# Altium PCB ArduinoMega.PcbDoc
Units mm, origin at the board's own origin, x right, y up, seen from the top; angles counter-clockwise.
Board outline 100 x 200 mm, 2 copper layers (Top Layer, Bottom Layer); 8 components, 51 nets, 160 pads, 6 vias.
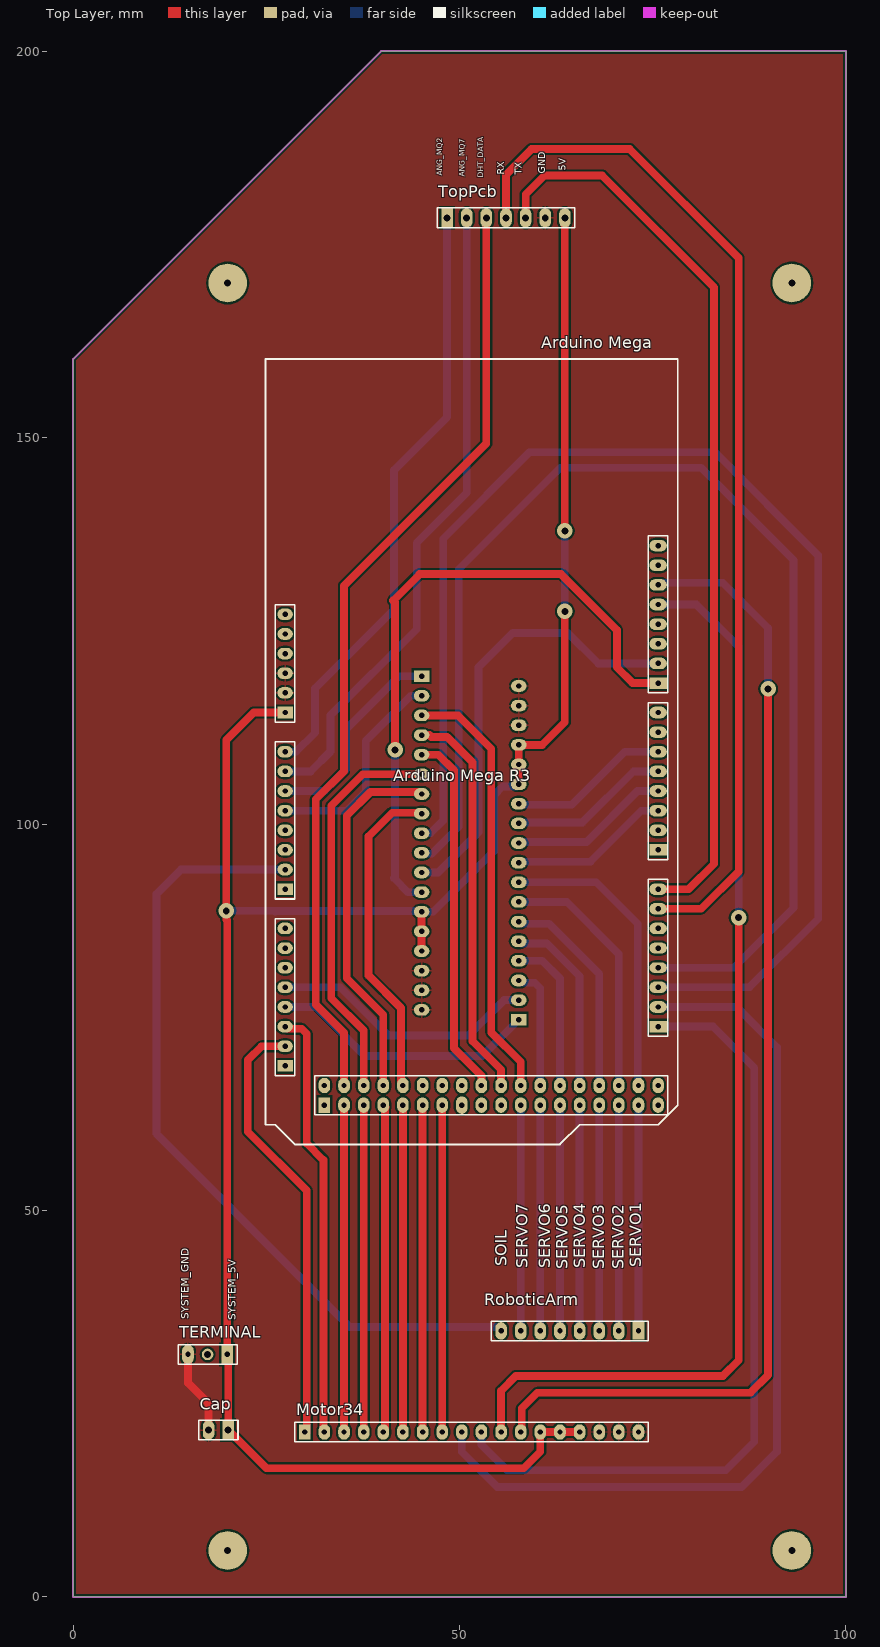
[diagram p0: Top Layer view]
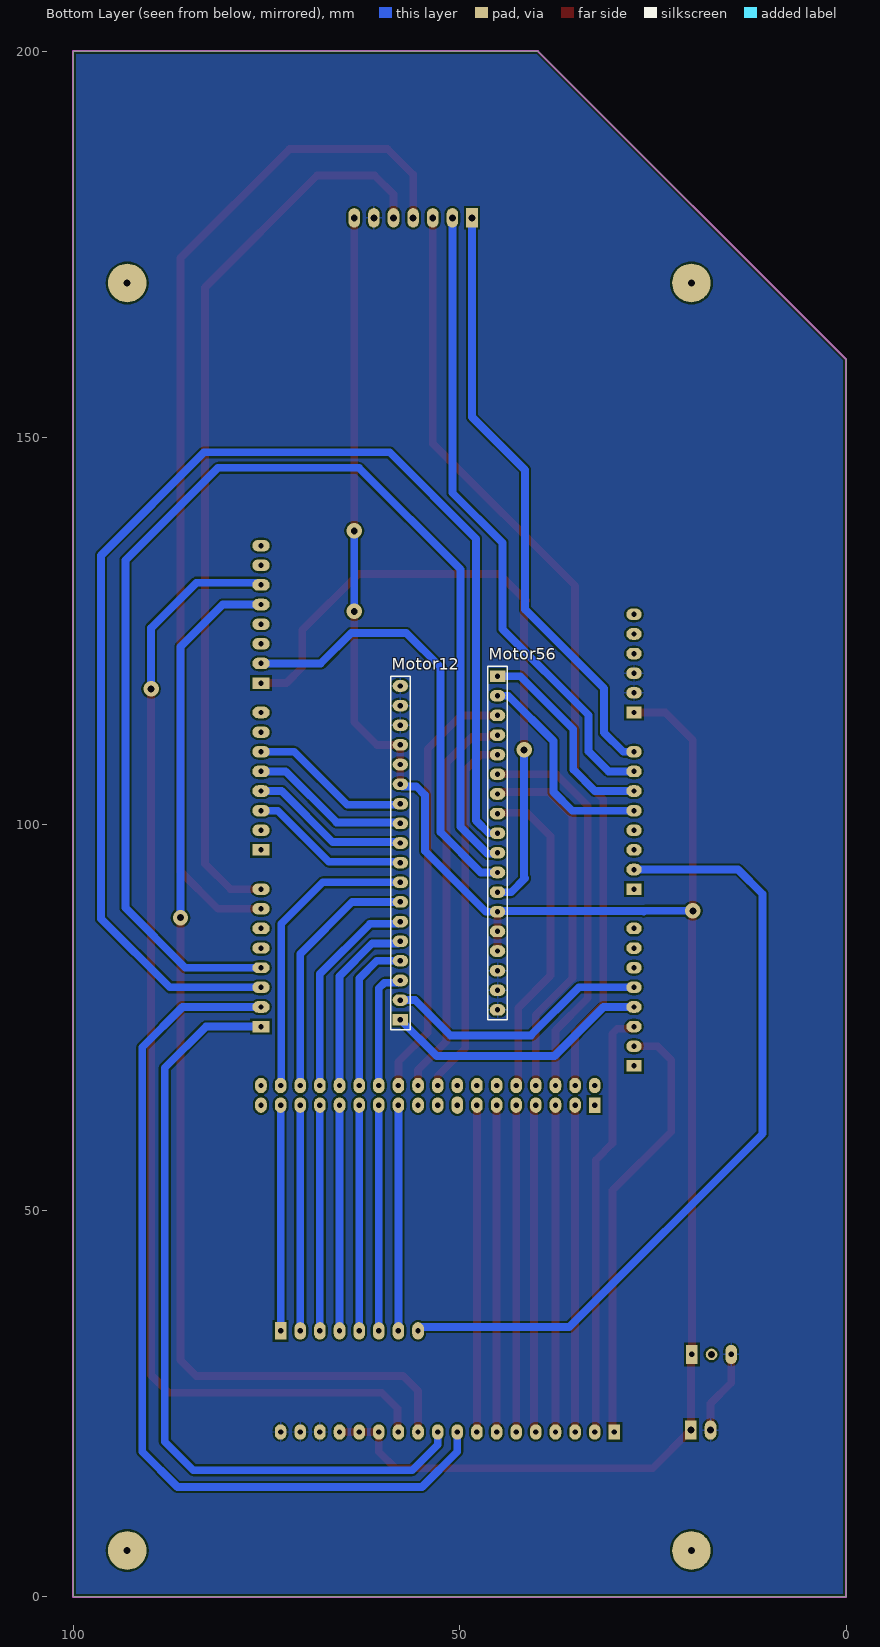
[diagram p1: Bottom Layer view, seen from below]

## Layer stack, top to bottom
Top Solder: solder mask 0.0102, Solder Resist, Dk 3.5
Top Layer: signal copper 0.0356
Dielectric 1: dielectric 0.32, FR-4, Dk 4.8
Bottom Layer: signal copper 0.0356
Bottom Solder: solder mask 0.0102, Solder Resist, Dk 3.5

## Board outline
0,0 0,160.147 39.853,200 100,200 100,0

## Design rules (kind name [scope] priority, off if disabled: settings)
Clearance [All] p1: gap=0.254 ignorepadtopadclearanceinfootprint=FALSE except(0: Arc-Hole Track-Hole SMDPad-Hole THPad-Hole Via-Hole Fill-Hole Poly-Hole Region-Hole Text-Hole; 1: Arc-Arc Arc-Track Arc-SMDPad Arc-THPad Arc-Via Track-Track Track-SMDPad Track-THPad Track-Via SMDPad-SMDPad SMDPad-THPad SMDPad-Via THPad-THPad THPad-Via Via-Via)
ComponentClearance [All] p1: gap=0.254 collisioncheckmode=3 verticalgap=0 showdistances=FALSE
PolygonConnect [All] p1: connectstyle=Relief reliefconductorwidth=0.254 reliefentries=4 polygonreliefangle="90 Angle" airgapwidth=0.254
RoutingVias [All] p1: holewidth=0.711 width=1.27 viastyle="Through Hole" minholewidth=0.711 minwidth=1.27 maxholewidth=0.711 maxwidth=1.27
SolderMaskExpansion [All] p1: expansion=0.102
Width [All] p1: maxlimit=1 minlimit=0.8 preferedwidth=1 minimp=50.000000 maximp=50.000000 favimp=50.000000
29 further rules are at their usual default settings.

## Components (designator, comment, footprint, x,y, rotation, side; value= is the part's Value field where it differs from the comment)
"Arduino Mega" "ARDUINO MEGA" "ARDUINO MEGA" 52.832,106.807 r270 top
Cap "Cap" HDR1X2 20.066,21.59 r180 top
Motor12 "Header 18" HDR1X18 57.658,74.676 r90 bottom
Motor34 "Header 18" HDR1X18 29.972,21.336 r0 top
Motor56 "Header 18" HDR1X18 45.085,119.126 r270 bottom
RoboticArm "Header 8" HDR1X8 73.152,34.417 r180 top
TERMINAL "Header 3" HDR1X3 19.939,31.369 r180 top
TopPcb "Header 7" HDR1X7 48.387,178.435 r0 top

## Footprints (in the part's own frame and the unit in brackets; to place one, negate y for a bottom-side part, rotate by r counter-clockwise, add the part's x,y. Pads: shape width x height; smd on the part's side, far side on the other; paste and mask are expansions set on the pad)
"ARDUINO MEGA" [mm] "Arduino Mega 2560"
  rect 1.5x2.25 hole 0.7: 0(10.16,22.86) 8(-11.43,22.86) 21(33.02,22.86)
  oval 1.5x2.25 hole 0.7: 1(7.62,22.86) 2(5.08,22.86) 3(2.54,22.86) 4(0,22.86) 5(-2.54,22.86) 6(-5.08,22.86) 7(-7.62,22.86) 9(-13.97,22.86) 10(-16.51,22.86) 11(-19.05,22.86) 12(-21.59,22.86) 13(-24.13,22.86) 14(15.24,22.86) 15(17.78,22.86) 16(20.32,22.86) 19(27.94,22.86) 20(30.48,22.86) 76(-26.67,22.86) 77(-29.21,22.86)
  oval 1.4x2.25 hole 0.7: 17(22.86,22.86) 18(25.4,22.86)
  oval 2x1.5 hole 0.7: 22(40.64,20.32) 23(43.18,20.32) 24(40.64,17.78) 25(43.18,17.78) 26(40.64,15.24) 27(43.18,15.24) 28(40.64,12.7) 29(43.18,12.7) 30(40.64,10.16) 31(43.18,10.16) 32(40.64,7.62) 33(43.18,7.62) 34(40.64,5.08) 35(43.18,5.08) 36(40.64,2.54) 37(43.18,2.54) 38(40.64,0) 39(43.18,0) 40(40.64,-2.54) 42(40.64,-5.08) 43(43.18,-5.08) 44(40.64,-7.62) 45(43.18,-7.62) 46(40.64,-10.16) 47(43.18,-10.16) 48(40.64,-12.7) 49(43.18,-12.7) 50(40.64,-15.24) 51(43.18,-15.24) 52(40.64,-17.78) 53(43.18,-17.78) 78(40.64,-20.32) 80(43.18,22.86) 81(40.64,22.86)
  oval 2.25x1.5 hole 0.7: 41(43.18,-2.54)
  oval 1.5x2 hole 0.7: 54(-20.32,-25.4) 55(-17.78,-25.4) 56(-15.24,-25.4) 57(-12.7,-25.4) 58(-10.16,-25.4) 60(-2.54,-25.4) 61(0,-25.4) 62(2.54,-25.4) 63(5.08,-25.4) 64(7.62,-25.4) 65(10.16,-25.4) 66(12.7,-25.4) 68(20.32,-25.4) 69(22.86,-25.4) 70(25.4,-25.4) 71(27.94,-25.4) 72(30.48,-25.4) 73(33.02,-25.4) 74(35.56,-25.4)
  rect 1.5x2 hole 0.7: 59(-7.62,-25.4) 67(15.24,-25.4) 75(38.1,-25.4)
  rect 2x1.5 hole 0.7: 79(43.18,-20.32)
  silkscreen extent -53.34,-27.94 48.26,25.4
HDR1X2 [mm] "Connector; Header; 2 Position"
  rect 1.5x2.5 hole 0.9: 1(0,0)
  oval 1.5x2.5 hole 0.9: 2(2.54,0)
  silkscreen extent -1.27,-1.27 3.81,1.27
HDR1X3 [mm] "Connector; Header; 3 Position"
  rect 1.5x2.5 hole 0.7: 1(0,0)
  round 1.5 hole 0.9: 2(2.54,0)
  oval 1.5x2.5 hole 0.7: 3(5.08,0)
  silkscreen extent -1.27,-1.27 6.35,1.27
HDR1X7 [mm] "Connector; Header; 7 Position"
  rect 1.5x2.5 hole 0.9: 1(0,0)
  oval 1.5x2.5 hole 0.9: 2(2.54,0) 3(5.08,0) 4(7.62,0) 5(10.16,0) 6(12.7,0) 7(15.24,0)
  silkscreen extent -1.27,-1.27 16.51,1.27
HDR1X8 [mm] "Connector; Header; 8 Position"
  rect 1.5x2.25 hole 0.7: 1(0,0)
  oval 1.5x2.25 hole 0.7: 2(2.54,0) 3(5.08,0) 4(7.62,0) 5(10.16,0) 6(12.7,0) 7(15.24,0) 8(17.78,0)
  silkscreen extent -1.27,-1.27 19.05,1.27
HDR1X18 [mm] "Connector; Header; 18 Position"
  rect 1.5x2 hole 0.7: 1(0,0)
  oval 1.5x2 hole 0.7: 2(2.54,0) 3(5.08,0) 4(7.62,0) 5(10.16,0) 6(12.7,0) 7(15.24,0) 8(17.78,0) 9(20.32,0) 10(22.86,0) 11(25.4,0) 12(27.94,0) 13(30.48,0) 14(33.02,0) 15(35.56,0) 16(38.1,0) 17(40.64,0) 18(43.18,0)
  silkscreen extent -1.27,-1.27 44.45,1.27

## Part data
Cap: library part "Header 2", "Header, 2-Pin", LatestRevisionDate=17-Jul-2002, LatestRevisionNote="Re-released for DXP Platform.", Publisher="Altium Limited"
Motor12 Motor34 Motor56: "Header, 18-Pin", LatestRevisionDate=17-Jul-2002, LatestRevisionNote="Re-released for DXP Platform.", Publisher="Altium Limited"
RoboticArm: "Header, 8-Pin", LatestRevisionDate=17-Jul-2002, LatestRevisionNote="Re-released for DXP Platform.", Publisher="Altium Limited"
TERMINAL: "Header, 3-Pin", LatestRevisionDate=17-Jul-2002, LatestRevisionNote="Re-released for DXP Platform.", Publisher="Altium Limited"
TopPcb: "Header, 7-Pin", LatestRevisionDate=17-Jul-2002, LatestRevisionNote="Re-released for DXP Platform.", Publisher="Altium Limited"

## Free pads (board coordinates)
  round 5 hole 0.9: 2(20,6) 3(93,6) 4(93,170) 5(20,170)

## Via types
v1: diameter 2, hole 0.9, Top Layer to Bottom Layer, 6 vias

## Nets (pads, with @x,y where several pads share a name; then routed paths per layer and width w, separated by ;. In a path a pad name is that pad's centre, name@x,y a point inside that pad or via, vN(x,y) a via of type N, cw(c..) or ccw(c..) an arc to the next point about the centre after c; other vN are vias at no path point)
5: "Arduino Mega.59" Cap.1 Motor12.13 Motor12.14 Motor12.15 Motor34.13 Motor34.14 Motor34.15 Motor56.13 Motor56.14 Motor56.15 TERMINAL.1 TopPcb.7 | length 280.5
  Top Layer w1: TERMINAL.1@19.685,30.861 20.066,30.48 Cap.1@20.066,22.623 ; TERMINAL.1@19.939,30.734 TERMINAL.1 19.939,43.434 19.939,87.503 19.812,87.63 v1(19.812,88.773) 19.812,110.871 23.368,114.427 27.432,114.427 ; Cap.1 25.019,16.637 58.293,16.637 60.452,18.796 Motor34.13 Motor34.14 Motor34.15 ; Motor56.15 Motor56.14 Motor56.13 ; Motor12.13 Motor12.14 Motor12.15 60.706,110.236 63.627,113.157 v1(63.627,127.508) ; v1(63.627,137.922) TopPcb.7 TopPcb.7@63.754,178.562
  Bottom Layer w1: v1(19.812,88.773) 26.032,88.773 26.159,88.646 26.25,88.737 45.085,88.737 Motor56.13 46.609,88.646 54.483,96.52 54.483,103.749 55.6,104.866 57.368,104.866 Motor12.13 ; v1(63.627,127.508) v1(63.627,137.922)
ANG_MQ2: "Arduino Mega.60" TopPcb.1 | length 78.6
  Bottom Layer w1: 27.432,109.347 28.829,109.347 31.306,111.824 31.306,117.539 41.529,127.762 41.529,145.796 48.387,152.654 TopPcb.1
ANG_MQ7: "Arduino Mega.61" TopPcb.2 | length 83.3
  Bottom Layer w1: 27.432,106.807 30.734,106.807 33.306,109.379 33.306,114.078 44.45,125.222 44.45,136.398 50.927,142.875 TopPcb.2
Current_sensor_1_1: "Arduino Mega.72" Motor12.1 | length 34.8
  Bottom Layer w1: 27.432,76.327 31.369,76.327 37.719,69.977 52.959,69.977 Motor12.1
Current_sensor_1_2: "Arduino Mega.71" Motor12.2 | length 34.7
  Bottom Layer w1: 27.432,78.867 34.544,78.867 40.767,72.644 51.181,72.644 55.753,77.216 Motor12.2
Current_sensor_2_1: "Arduino Mega.74" Motor34.1 | length 56.9
  Top Layer w1: 27.432,71.247 24.384,71.247 22.606,69.469 22.606,60.198 30.226,52.578 Motor34.1@30.226,21.336
Current_sensor_2_2: "Arduino Mega.73" Motor34.2 | length 55.6
  Top Layer w1: 27.432,73.787 27.722,73.497 29.591,73.497 30.226,72.862 30.226,58.674 32.385,56.515 Motor34.2@32.385,21.336
Current_sensor_3_1: "Arduino Mega.62" Motor56.1 | length 26.9
  Bottom Layer w1: 27.432,104.267 32.512,104.267 35.306,107.061 35.306,112.268 42.164,119.126 Motor56.1
Current_sensor_3_2: "Arduino Mega.63" Motor56.2 | length 27.7
  Bottom Layer w1: 27.432,101.727 35.433,101.727 37.846,104.14 37.846,110.744 43.688,116.586 Motor56.2
DHT_DATA: "Arduino Mega.52" TopPcb.3 | length 122.8
  Top Layer w1: 35.052,66.252 35.052,72.991 31.401,76.642 31.401,103.19 35.052,106.841 35.052,130.81 53.467,149.225 TopPcb.3
DRIVE_1_4: "Arduino Mega.32" Motor12.3 | length 15.8
  Bottom Layer w1: Motor12.3 57.948,79.466 59.716,79.466 60.452,78.73 60.452,66.167
DRIVE_1_5: "Arduino Mega.5" Motor12.12 | length 20.9
  Bottom Layer w1: Motor12.12@57.658,102.489 64.516,102.489 71.374,109.347 75.692,109.347
DRIVE_1_6: "Arduino Mega.4" Motor12.11 | length 20.8
  Bottom Layer w1: Motor12.11@57.658,100.203 65.913,100.203 72.517,106.807 75.692,106.807
DRIVE_1_7: "Arduino Mega.30" Motor12.4 | length 20.1
  Bottom Layer w1: Motor12.4 60.706,82.296 62.992,80.01 62.992,66.167
DRIVE_1_8: "Arduino Mega.28" Motor12.5 | length 23.9
  Bottom Layer w1: Motor12.5 57.948,84.546 61.284,84.546 65.532,80.298 65.532,66.167
DRIVE_1_9: "Arduino Mega.26" Motor12.6 | length 27.6
  Bottom Layer w1: Motor12.6 57.948,87.086 61.573,87.086 68.072,80.587 68.072,66.167
DRIVE_2_4: "Arduino Mega.53" Motor34.3 | length 42.3
  Top Layer w1: Motor34.3 35.052,63.627
DRIVE_2_5: "Arduino Mega.13" Motor34.12 | length 150.1
  Top Layer w1: Motor34.12@58.039,21.336 58.039,24.384 60.071,26.416 87.63,26.416 89.916,28.702 v1(89.916,117.475)
  Bottom Layer w1: 75.692,130.937 75.982,131.227 84.038,131.227 89.916,125.349 v1(89.916,117.475)
DRIVE_2_6: "Arduino Mega.12" Motor34.11 | length 142.7
  Top Layer w1: Motor34.11 55.372,26.67 57.277,28.575 84.074,28.575 86.106,30.607 v1(86.106,87.884)
  Bottom Layer w1: 75.692,128.397 80.645,128.397 86.106,122.936 v1(86.106,87.884)
DRIVE_2_7: "Arduino Mega.51" Motor34.4 | length 42.3
  Top Layer w1: Motor34.4 37.592,63.627
DRIVE_2_8: "Arduino Mega.49" Motor34.5 | length 42.5
  Top Layer w1: 40.132,63.627 40.422,63.337 40.362,63.337 Motor34.5@40.362,21.336
DRIVE_2_9: "Arduino Mega.47" Motor34.6 | length 42.3
  Top Layer w1: Motor34.6 42.672,63.627
DRIVE_3_4: "Arduino Mega.34" Motor56.3 | length 54.9
  Top Layer w1: 46.101,114.046 49.784,114.046 54.102,109.728 54.102,73.025 57.912,69.215 57.912,66.167
DRIVE_3_5: "Arduino Mega.8" Motor56.12 | length 84.8
  Top Layer w1: v1(41.656,109.601) 41.656,128.651 41.402,128.905 44.831,132.334 63.119,132.334 70.358,125.095 70.358,120.269 72.39,118.237 75.692,118.237
  Bottom Layer w1: v1(41.656,109.601) 41.656,93.091 41.529,92.964 43.307,91.186 Motor56.12
DRIVE_3_6: "Arduino Mega.9" Motor56.11 | length 57.6
  Bottom Layer w1: Motor56.11 47.244,93.726 52.451,98.933 52.451,120.269 56.896,124.714 64.008,124.714 67.945,120.777 75.692,120.777
DRIVE_3_7: "Arduino Mega.36" Motor56.4 | length 50.3
  Top Layer w1: 46.101,111.506 46.355,111.252 48.387,111.252 51.689,107.95 51.689,71.882 55.372,68.199 55.372,66.252
DRIVE_3_8: "Arduino Mega.38" Motor56.5 | length 46.3
  Top Layer w1: 46.101,108.966 47.244,108.966 49.276,106.934 49.276,70.993 52.832,67.437 52.832,66.167
DRIVE_3_9: "Arduino Mega.50" Motor56.6 | length 51.2
  Top Layer w1: 37.592,66.294 37.592,73.279 33.401,77.47 33.401,102.362 37.465,106.426 Motor56.6
Encoder_1_DIG_1: "Arduino Mega.24" Motor12.7 | length 32.8
  Bottom Layer w1: Motor12.7 63.881,89.916 70.612,83.185 70.612,66.167
Encoder_1_DIG_2: "Arduino Mega.22" Motor12.8 | length 38.6
  Bottom Layer w1: Motor12.8 67.691,92.456 73.067,87.08 73.067,66.167 73.152,66.167
Encoder_1_INT_1: "Arduino Mega.3" Motor12.10 | length 20.8
  Bottom Layer w1: Motor12.10@57.658,97.663 66.421,97.663 73.025,104.267 75.692,104.267
Encoder_1_INT_2: "Arduino Mega.2" Motor12.9 | length 20.6
  Bottom Layer w1: Motor12.9@57.785,95.123 66.929,95.123 73.533,101.727 75.692,101.727
Encoder_2_DIG_1: "Arduino Mega.45" Motor34.7 | length 42.2
  Top Layer w1: Motor34.7@45.212,21.463 45.212,63.627
Encoder_2_DIG_2: "Arduino Mega.43" Motor34.8 | length 42.3
  Top Layer w1: Motor34.8 47.752,63.627
Encoder_2_INT_1: "Arduino Mega.21" Motor34.10 | length 102.9
  Bottom Layer w1: Motor34.10 52.832,19.685 56.134,16.383 84.455,16.383 88.138,20.066 88.138,68.453 82.804,73.787 75.692,73.787
Encoder_2_INT_2: "Arduino Mega.20" Motor34.9 | length 116.9
  Bottom Layer w1: Motor34.9 50.292,18.796 54.864,14.224 86.487,14.224 91.059,18.796 91.059,71.12 85.852,76.327 75.692,76.327
Encoder_3_DIG_1: "Arduino Mega.48" Motor56.7 | length 47.7
  Top Layer w1: 40.132,66.294 40.132,75.311 35.401,80.042 35.401,101.06 38.481,104.14 Motor56.7@45.085,104.14
Encoder_3_DIG_2: "Arduino Mega.46" Motor56.8 | length 41.9
  Top Layer w1: 42.418,66.421 42.418,76.2 38.227,80.391 38.227,98.425 41.275,101.473 Motor56.8@45.085,101.473
Encoder_3_INT_1: "Arduino Mega.18" Motor56.10 | length 159
  Bottom Layer w1: Motor56.10@45.085,96.139 46.389,96.139 49.879,99.629 49.879,132.937 63.024,146.082 81.248,146.082 93.218,134.112 93.218,89.154 85.471,81.407 75.692,81.407
Encoder_3_INT_2: "Arduino Mega.19" Motor56.9 | length 170
  Bottom Layer w1: Motor56.9 46.228,98.806 47.879,100.457 47.879,136.906 59.055,148.082 83.058,148.082 96.393,134.747 96.393,87.757 87.503,78.867 75.692,78.867
GND: "Arduino Mega.57" "Arduino Mega.58" Cap.2 Motor12.16 Motor12.17 Motor12.18 Motor34.16 Motor34.17 Motor34.18 Motor56.16 Motor56.17 Motor56.18 TERMINAL.3 TopPcb.6 | length 10.9
  Top Layer w1: TERMINAL.3 14.859,27.686 17.526,25.019 Cap.2
RX: "Arduino Mega.15" TopPcb.4 | length 134.7
  Top Layer w1: TopPcb.4 56.007,184.023 59.309,187.325 72.009,187.325 86.106,173.228 86.106,93.853 81.28,89.027 75.692,89.027
SERVO1: "Arduino Mega.23" RoboticArm.1 | length 29.2
  Bottom Layer w1: RoboticArm.1 73.152,63.627
SERVO2: "Arduino Mega.25" RoboticArm.2 | length 29.2
  Bottom Layer w1: RoboticArm.2 70.612,63.627
SERVO3: "Arduino Mega.27" RoboticArm.3 | length 29.2
  Bottom Layer w1: RoboticArm.3 68.072,63.627
SERVO4: "Arduino Mega.29" RoboticArm.4 | length 29.2
  Bottom Layer w1: RoboticArm.4 65.532,63.627
SERVO5: "Arduino Mega.31" RoboticArm.5 | length 29.2
  Bottom Layer w1: RoboticArm.5 62.992,63.627
SERVO6: "Arduino Mega.33" RoboticArm.6 | length 29.2
  Bottom Layer w1: RoboticArm.6 60.452,63.627
SERVO7: "Arduino Mega.35" RoboticArm.7 | length 29.2
  Bottom Layer w1: RoboticArm.7 57.912,63.627
SOIL: "Arduino Mega.66" RoboticArm.8 | length 104.2
  Bottom Layer w1: 27.432,94.107 13.97,94.107 10.795,90.932 10.795,59.944 35.814,34.925 54.991,34.925 55.372,34.544 RoboticArm.8
TX: "Arduino Mega.14" TopPcb.5 | length 117.6
  Top Layer w1: TopPcb.5 58.547,181.483 60.96,183.896 68.453,183.896 82.931,169.418 82.931,94.869 79.629,91.567 75.692,91.567
pads on no net: "Arduino Mega.0" "Arduino Mega.1" "Arduino Mega.6" "Arduino Mega.7" "Arduino Mega.10" "Arduino Mega.11" "Arduino Mega.16" "Arduino Mega.17" "Arduino Mega.37" "Arduino Mega.39" "Arduino Mega.40" "Arduino Mega.41" "Arduino Mega.42" "Arduino Mega.44" "Arduino Mega.54" "Arduino Mega.55" "Arduino Mega.56" "Arduino Mega.64" "Arduino Mega.65" "Arduino Mega.67" "Arduino Mega.68" "Arduino Mega.69" "Arduino Mega.70" "Arduino Mega.75" "Arduino Mega.76" "Arduino Mega.77" "Arduino Mega.78" "Arduino Mega.79" "Arduino Mega.80" "Arduino Mega.81" TERMINAL.2

## Polygon pours and split planes (outlines as drawn)
GND on Top Layer "Top" (solid, remove dead copper, pour order 13): 0,0 0,160.147 39.853,200 100,200 100,0
GND on Bottom Layer "Bottom" (solid, remove dead copper, pour order 14): 0,0 0,160.147 39.853,200 100,200 100,0

## Keep-outs
Keep-Out Layer:
  the board outline again, w0.254

## Silkscreen, mask and mechanical layers (free items; w line width, h text height)
Top Overlay:
  text "5V" at 63.754,184.531 h0.9 r90
  text "GND" at 61.087,184.15 h0.9 r90
  text "RX" at 55.753,184.023 h0.9 r90
  text "TX" at 58.039,184.023 h0.9 r90
  text "ANG_MQ2" at 47.762,183.896 h0.7 r90
  text "ANG_MQ7" at 50.683,183.769 h0.7 r90
  text "DHT_DATA" at 53.096,183.642 h0.7 r90
  text "SOIL" at 56.134,42.799 h1.52 r90
  text "SERVO1" at 73.533,42.672 h1.52 r90
  text "SERVO7" at 58.801,42.545 h1.52 r90
  text "SERVO6" at 61.722,42.545 h1.52 r90
  text "SERVO4" at 66.294,42.545 h1.52 r90
  text "SERVO5" at 64.008,42.418 h1.52 r90
  text "SERVO3" at 68.707,42.418 h1.52 r90
  text "SERVO2" at 71.247,42.418 h1.52 r90
  text "SYSTEM_GND" at 14.986,35.941 h1 r90
  text "SYSTEM_5V" at 21.042,35.814 h1 r90

## Text inside footprints (layer, text, board x,y; h text height)
"Arduino Mega": Top Overlay "Arduino Mega R3" at 41.402,105.537 h1.52